# Altium PCB Atomizer_medical_V1_4.PCBDOC
Units mil, origin at the board's own origin, x right, y up, seen from the top; angles counter-clockwise.
Board outline 984.71 x 2203.7 mil, 4 copper layers (Top, Inner Layer 2, Inner Layer 3, Bottom), stack 35.4 mil thick; 109 components, 54 nets, 241 pads, 179 vias.
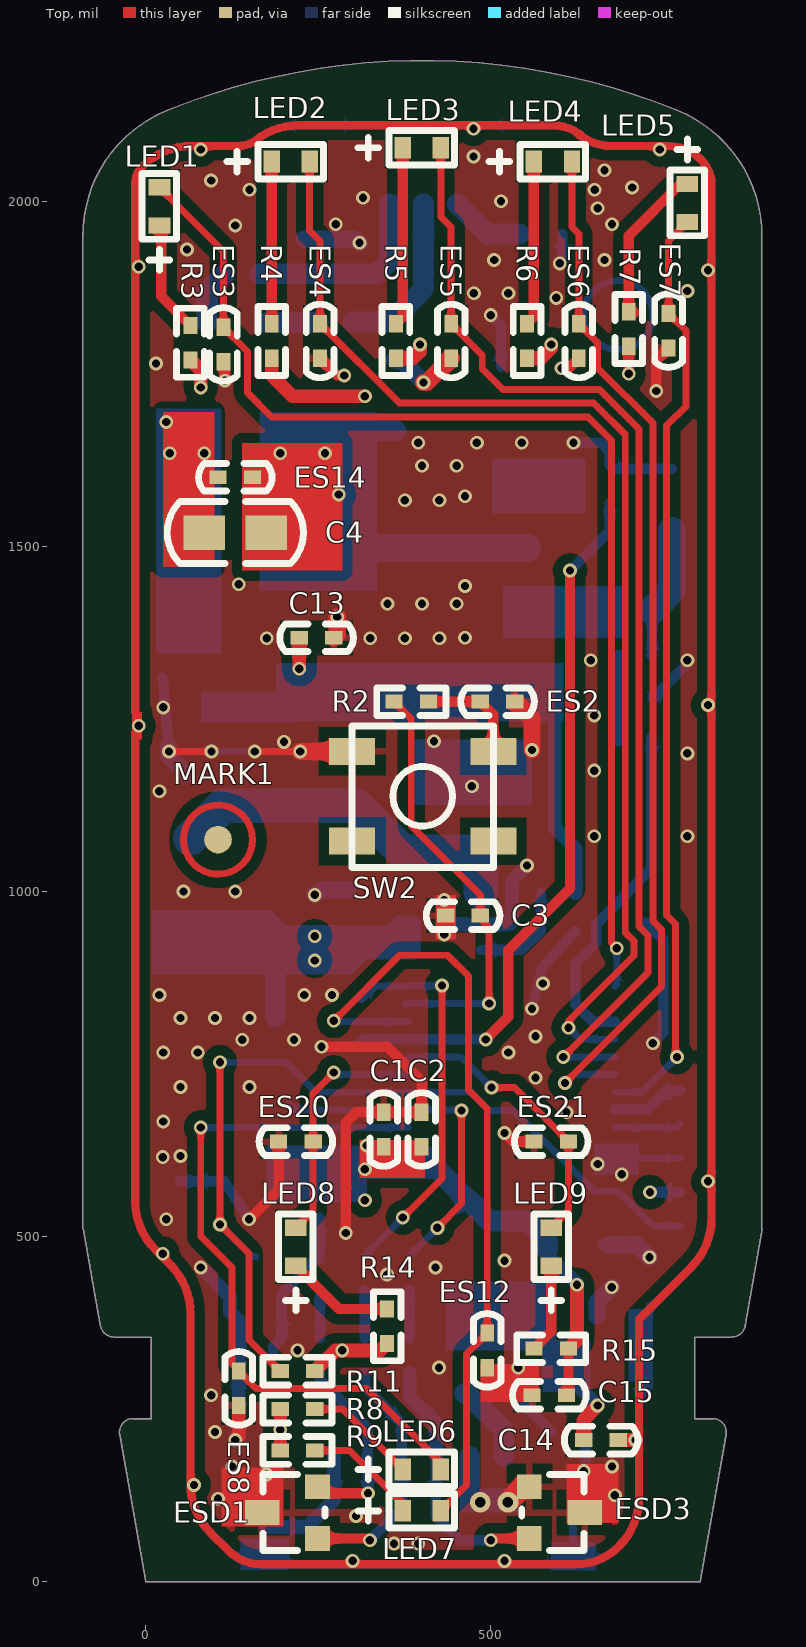
[diagram p0: Top view]
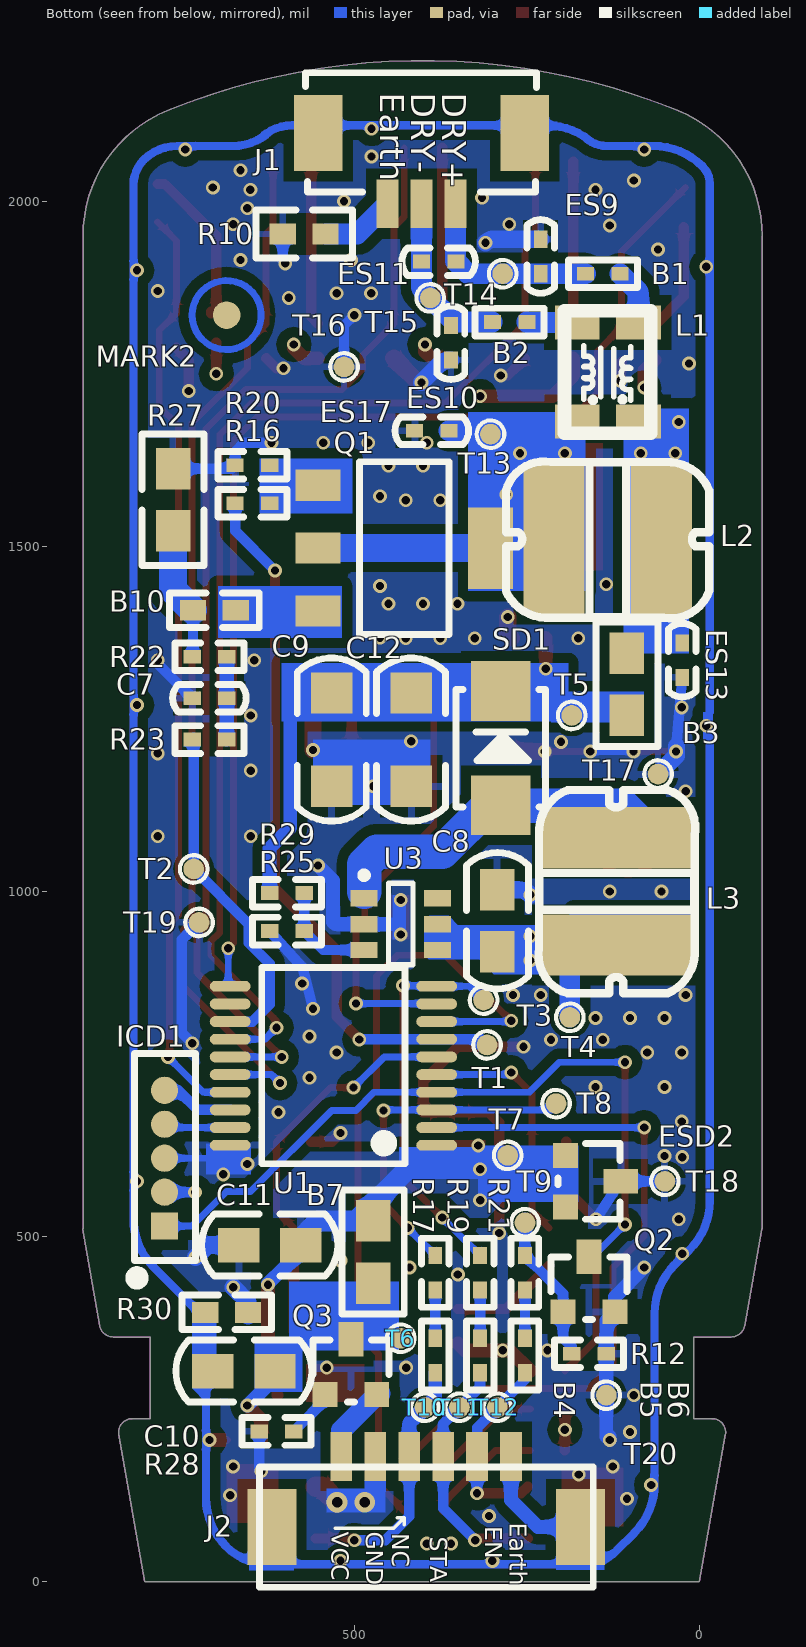
[diagram p1: Bottom view, seen from below]
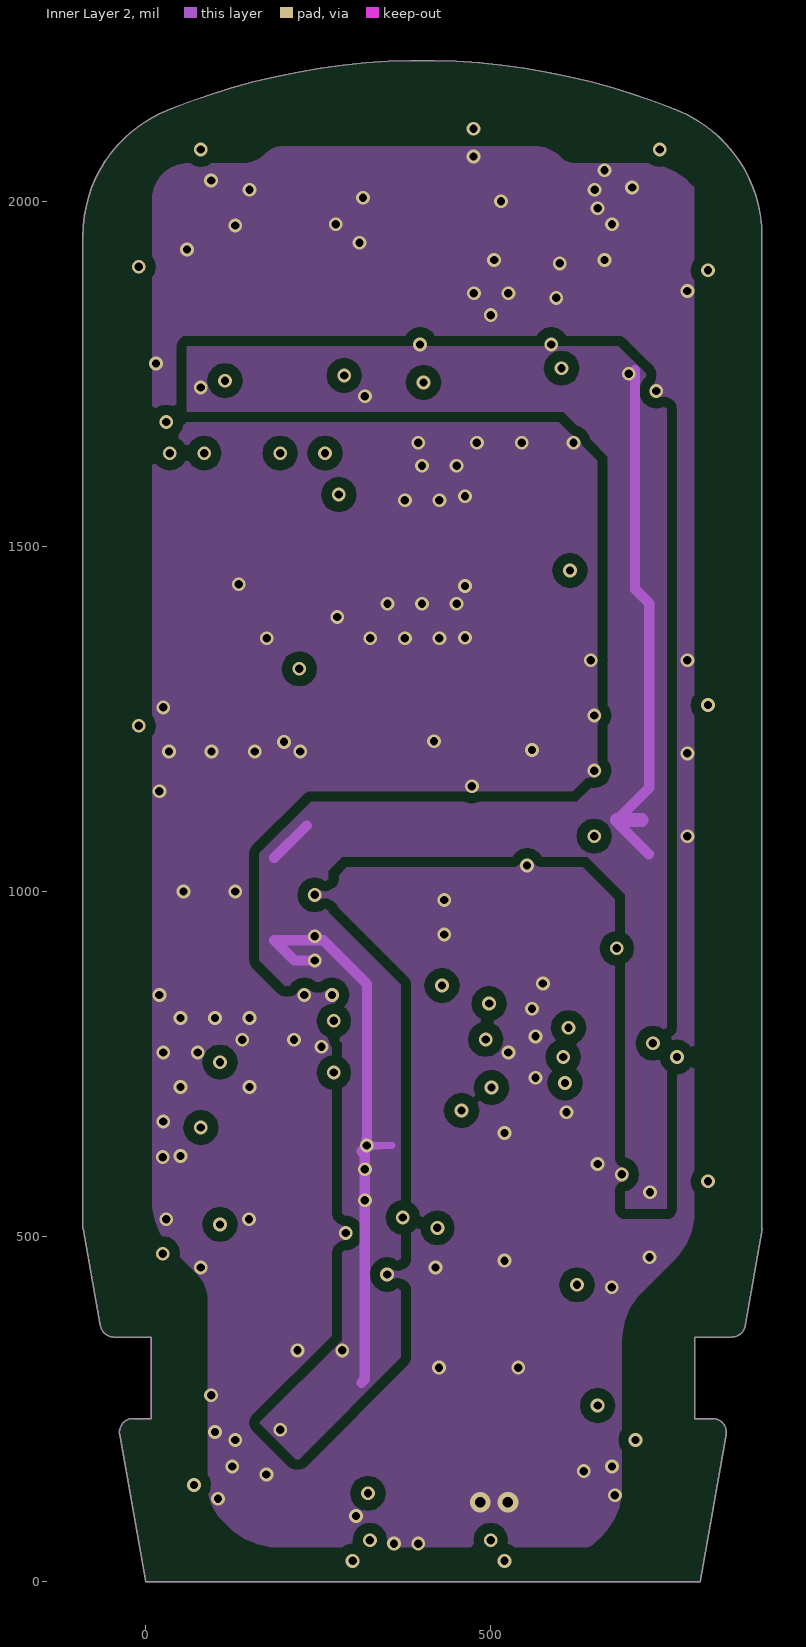
[diagram p2: Inner Layer 2]
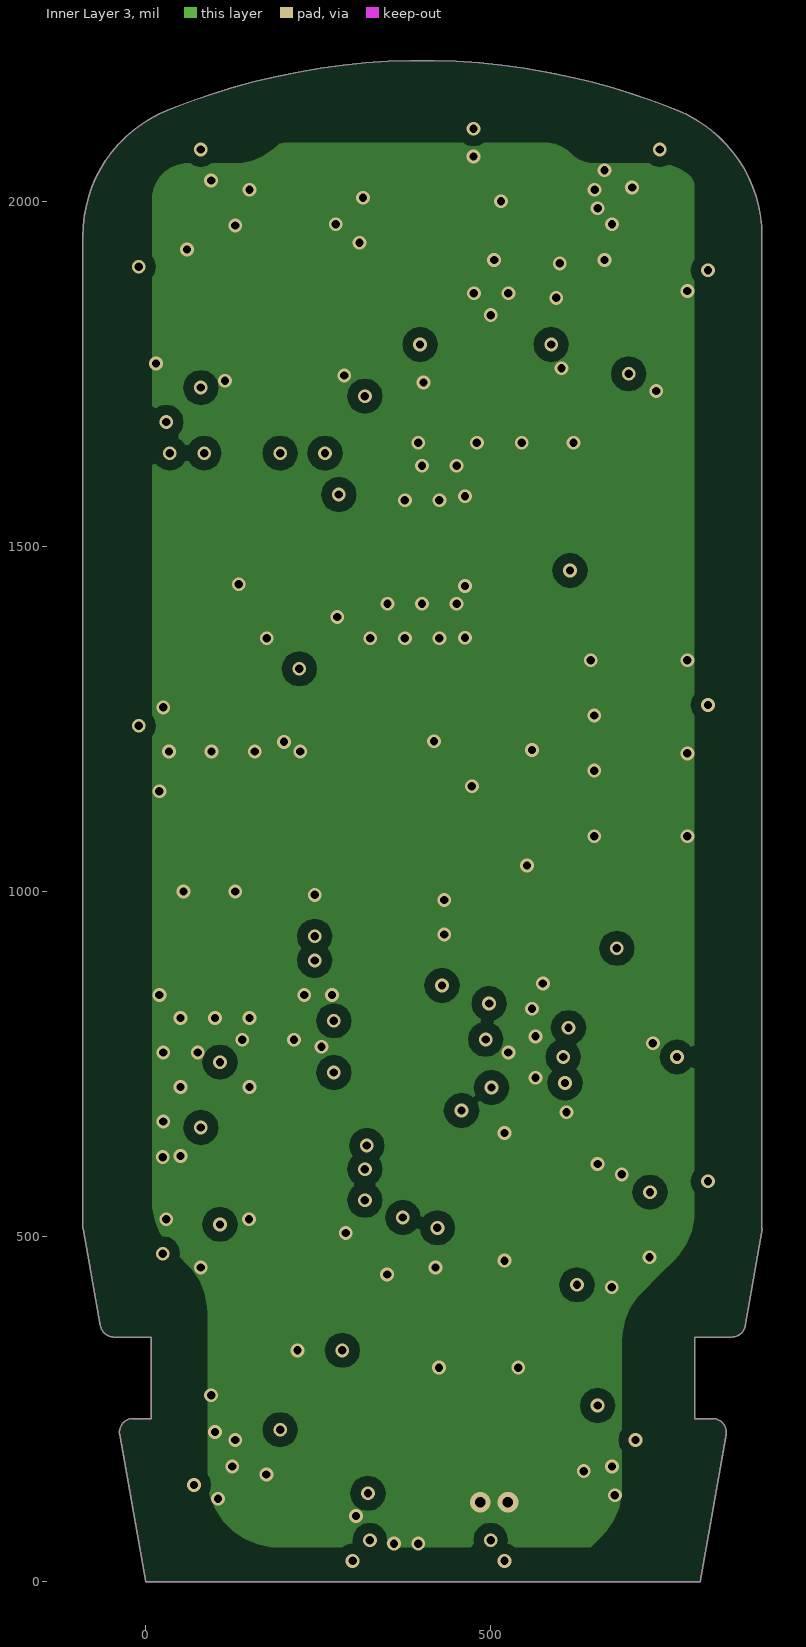
[diagram p3: Inner Layer 3]

## Layer stack, top to bottom
Solder Mask Top: solder mask 0.4, Solder Resist, Dk 3.5
Top: signal copper 1.35
Dielectric1: dielectric 10, FR-4, Dk 4.3
Inner Layer 2: signal copper 1.35
Dielectric2: dielectric 10, FR-4, Dk 4.3
Inner Layer 3: signal copper 1.35
Dielectric3: dielectric 10, FR-4, Dk 4.3
Bottom: signal copper 1.35
Solder Mask Bottom: solder mask 0.4, Solder Resist, Dk 3.5

## Board outline
0,-0.05 -37.59,213.12 cw(c-18.2,216.54) -18.2,236.22 8.07,236.22 8.07,354.33 -45.97,354.33 cw(c-45.97,374.02) -65.35,370.6 -90.06,510.69 -91.11,511.74 -91.11,1949.48 cw(c105.74,1949.48) 31.92,2131.97 cw(c401.02,1219.54) 770.11,2131.97 cw(c696.29,1949.48) 893.14,1949.48 893.14,511.32 893.6,510.66 868.91,370.6 cw(c849.52,374.02) 849.52,354.33 795.48,354.33 795.48,236.22 821.75,236.22 cw(c821.75,216.54) 841.14,213.12 803.55,-0.04 803.55,0

## Design rules (kind name [scope] priority, off if disabled: settings)
Clearance Clearance_polygon [InPolygon] p1: gap=15
Clearance Clearance_all [All] p2: gap=9
ComponentClearance "'Default' PADS rule_12" [All] p1: gap=0 collisioncheckmode=3 verticalgap=0 showdistances=FALSE
FlightTimeFalling "'Default' PADS rule_10" [All] p1: maximum=10.00
FlightTimeRising "'Default' PADS rule_9" [All] p1: maximum=10.00
Length "'Default' PADS rule_5" [All] p1: maxlimit=50000 minlimit=0
MatchedLengths "'Default' PADS rule_11" [InNetClass('All Nets')] p1: tolerance=200 checknetsindiffpair=TRUE checkdiffpairvsdiffpair=FALSE checkxsignals=FALSE checkothers=FALSE
MaxMinImpedance "'Default' PADS rule_8" [All] p1: minimum=50.00 maximum=150.0
MinimumSolderMaskSliver [All] p1: minsoldermaskwidth=0
ParallelSegment "'Default' PADS rule_7" [All] p1: limit=1000 gap=200
ParallelSegment "'Default' PADS rule_6" [All] p2: limit=1000 gap=200
PlaneClearance "'Default' PADS rule_14" [All] p1: clearance=13
PlaneConnect "Power Plane Connect Style - from global settings" [All] p1: planeconnectstyle=Relief reliefexpansion=20 reliefentries=2 reliefconductorwidth=15 reliefairgap=10
PolygonConnect PolygonConnect_via [IsVia] p1: connectstyle=Direct reliefconductorwidth=10 reliefentries=4 polygonreliefangle="90 Angle" airgapwidth=10
PolygonConnect [All] p2: connectstyle=Relief reliefconductorwidth=10 reliefentries=4 polygonreliefangle="90 Angle" airgapwidth=15
RoutingCorners [All] p1: cornerstyle=45-Degree minsetback=10 maxsetback=100
RoutingLayers "'Default' PADS rule_3" [All] p1: top layer_v5=TRUE mid layer 1_v5=TRUE mid layer 2_v5=TRUE bottom layer_v5=TRUE
RoutingPriority "'Default' PADS rule_2" [All] p1: routingpriority=3
RoutingTopology "'Default' PADS rule" [All] p1: topology=Shortest
RoutingVias "'Default' PADS rule_4" [All] p1: holewidth=12 width=20 viastyle="Through Hole" minholewidth=12 minwidth=20 maxholewidth=35 maxwidth=80
SMDToCorner "'Default' PADS rule_16" [All] p1: distance=0
SMDToPlane "'Default' PADS rule_17" [All] p1: distance=0
SilkToSilkClearance [All] p1: silktosilkclearance=0
SilkToSolderMaskClearance SilkscreenOverComponentPads [IsPad] p1: minsilkscreentomaskgap=0 clearancetoexposedcopper=TRUE
SolderMaskExpansion "Solder Mask Expansion from CAM settings" [All] p1: expansion=5
Width "'Default' PADS rule_13" [All] p1: maxlimit=100 minlimit=10 preferedwidth=10
20 further rules are at their usual default settings.

## Components (designator, comment, footprint, x,y, rotation, side; value= is the part's Value field where it differs from the comment)
B1 "220Ohm@100MHz" 0402-B 115,1895 r0 bottom
B2 "220Ohm@100MHz" 0402-B 250,1825 r0 bottom
B3 "1K±25%@100MHz" 0805-B 105,1255 r90 bottom
B4 "220Ohm@100MHz" 0402-B 382.76,302.52 r90 bottom
B5 "220Ohm@100MHz" 0402-B 317.76,302.52 r90 bottom
B6 "220Ohm@100MHz" 0402-B 252.76,302.52 r90 bottom
B7 "1K±25%@100MHz" 0805-B 472.76,432.52 r90 bottom
B10 "1K±25%@100MHz" 0603 702.76,1407.52 r180 bottom
C1 "100nF/50V" 0402-C 345,680 r270 top
C2 "100nF/50V" 0402-C 400,680 r270 top
C3 "100nF/50V" 0402-C 435,965 r0 top
C4 "100pF/100V" 0805-C 85,1520 r0 top
C7 "1uF/10V" 0402-C 685,1280 r0 bottom
C8 "22uF/16V" 0805-C 292.76,912.52 r90 bottom
C9 "22uF/25V" 1206-C 532.76,1287.52 r270 bottom
C10 "22uF/16V" 0805-C 615,305 r0 bottom
C11 "22uF/16V" 0805-C 577.76,487.52 r0 bottom
C12 "22uF/25V" 1206-C 417.76,1287.52 r270 bottom
C13 "100nF/50V" 0402-C 222.76,1367.52 r0 top
C14 "100nF/50V" 0402-C 635,205 r0 top
C15 "100nF/50V" 0402-C 610,270 r180 top
ES2 "NC" 0402-C 485,1275 r0 top
ES3 "NC" 0402-C 112.76,1767.52 r90 top
ES4 "NC" 0402-C 252.76,1772.52 r90 top
ES5 "NC" 0402-C 442.76,1772.52 r90 top
ES6 "NC" 0402-C 627.76,1772.52 r90 top
ES7 "NC" 0402-C 757.76,1787.52 r90 top
ES8 "NC" 0402-C 135,255 r90 top
ES9 "NC" 0402-C 230,1945 r270 bottom
ES10 "NC" 0402-C 360,1820 r270 bottom
ES11 "NC" 0402-C 352.76,1912.52 r0 bottom
ES12 "NC" 0402-C 495,310 r90 top
ES13 "NC" 0402-C 25,1310 r90 bottom
ES14 "NC" 0402-C 105,1600 r0 top
ES17 "NC" 0402-C 362.76,1667.52 r0 bottom
ES20 "NC" 0402-C 192.76,637.52 r0 top
ES21 "NC" 0402-C 562.76,637.52 r0 top
ESD1 "PESD5V2S2UT" SOT23 210,100 r90 top
ESD2 "PESD5V2S2UT" SOT23 155,580 r270 bottom
ESD3 "PESD5V2S2UT" SOT23 595,100 r270 top
ICD1 "NC" SIP1X5P1.25A-180-DIP 775,515 r90 bottom
J1 "1.25T-3PWT" WAFER_1.25MMX3P_180 402.76,2047.52 r0 bottom locked
J2 "1.25T-6PWT" WAFER_1.25MMX6P_180 395.98,79.16 r180 bottom locked
L1 "22uH@100kHz/50V 1812" LINEFILTER 132.76,1752.52 r90 bottom
L2 "470uH/260mA" SP0502 132.76,1509.76 r180 bottom
L3 "10uH/2.5A" SP0502 120,1000 r90 bottom
LED1 "LED_BLUE" LED0603 20,1965 r90 top
LED2 "LED_BLUE" LED0603 182.64,2057.52 r0 top
LED3 "LED_BLUE" LED0603 372.64,2077.52 r0 top locked
LED4 "LED_BLUE" LED0603 562.64,2057.52 r0 top locked
LED5 "LED_BLUE" LED0603 785,2025 r270 top
LED6 "LED_RED" LED0603 372.64,162.52 r0 top locked
LED7 "LED_GREEN" LED0603 372.64,102.52 r0 top locked
LED8 "LED_BLUE" LED0603 217.76,457.4 r90 top locked
LED9 "LED_BLUE" LED0603 587.76,457.4 r90 top locked
MARK1 "MARK_POINT" MARK_POINT 105,1075 r90 top
MARK2 "MARK_POINT" MARK_POINT 685,1835 r90 bottom
Q1 "HSL0004" SOT223 427.76,1497.52 r270 bottom
Q2 "MMBT3904" SOT23 160,430 r180 bottom
Q3 "AO3401" SOT23 505,310 r180 bottom
R2 "NC" 0402 385,1275 r180 top
R3 "220/1%" 0402 65,1795 r90 top
R4 "220/1%" 0402 182.76,1797.52 r90 top
R5 "220/1%" 0402 362.76,1797.52 r90 top
R6 "220/1%" 0402 552.76,1797.52 r90 top
R7 "220/1%" 0402 700,1815 r90 top
R8 "220/1%" 0402 220,250 r0 top
R9 "220/1%" 0402 220,190 r0 top
R10 "0/1%" 0603 572.76,1952.52 r0 bottom
R11 "4.7K/1%" 0402 220,305 r0 top
R12 "220K/1%" 0402 160,330 r0 bottom
R14 "220/1%" 0402 350,370 r90 top
R15 "220/1%" 0402 587.76,337.52 r180 top
R16 "30/1%" 0402 647.76,1562.52 r180 bottom
R17 "47/1%" 0402 382.76,447.52 r270 bottom
R19 "47/1%" 0402 317.76,447.52 r270 bottom
R20 "220K/1%" 0402 647.76,1617.52 r180 bottom
R21 "47/1%" 0402 252.76,447.52 r270 bottom
R22 "10K/1%" 0402 710,1340 r0 bottom
R23 "1K/1%" 0402 710,1220 r180 bottom
R25 "10K/1%" 0402 597.76,942.52 r0 bottom
R27 "1r/1%" 0805 762.76,1567.52 r270 bottom
R28 "10K/1%" 0402 612.76,217.52 r180 bottom
R29 "220K/1%" 0402 597.76,997.52 r0 bottom
R30 "0/1%" 0603 685,390 r0 bottom
SD1 "SS24" SMA-403D 287.76,1207.52 r270 bottom
SW2 "NC" HTS-52MB 401.57,1137.88 r0 top
T1 "PWM" TP-SIP-1-Small1 307.76,777.52 r180 bottom
T2 "CT_AD" TP-SIP-1-Small1 732.76,1032.52 r180 bottom
T3 "STA" TP-SIP-1-Small1 312.76,842.52 r180 bottom
T4 "+5V" TP-SIP-1-Small1 187.76,817.52 r180 bottom
T5 "15VDC" TP-SIP-1-Small1 185,1255 r180 bottom
T6 "VIN" TP-SIP-1-Small1 432.76,352.52 r180 bottom
T7 "VCC" TP-SIP-1-Small1 277.76,617.52 r180 bottom
T8 "NC" TP-SIP-1-Small1 207.76,692.52 r180 bottom
T9 "EN_FOG" TP-SIP-1-Small1 252.76,520 r180 bottom
T10 "Dev_NC" TP-SIP-1-Small1 397.76,252.52 r90 bottom
T11 "NebSt" TP-SIP-1-Small1 347.76,252.52 r90 bottom
T12 "EN_Fog" TP-SIP-1-Small1 292.76,252.52 r90 bottom
T13 "DRY" TP-SIP-1-Small1 302.76,1662.52 r90 bottom
T14 "P+" TP-SIP-1-Small1 285,1895 r90 bottom
T15 "P-" TP-SIP-1-Small1 390,1860 r90 bottom
T16 "GND" TP-SIP-1-Small1 515,1760 r90 bottom
T17 "GND" TP-SIP-1-Small1 60,1170 r90 bottom
T18 "GND" TP-SIP-1-Small1 50,580 r90 bottom
T19 "GND" TP-SIP-1-Small1 725,955 r90 bottom
T20 "GND" TP-SIP-1-Small1 135,270 r90 bottom
U1 "PIC16F1578-I/SS" SSOP-20 530.4,747.41 r90 bottom
U3 "MT3608" SOT95P280X110-6N 432.76,952.52 r180 bottom

## Footprints (in the part's own frame and the unit in brackets; to place one, negate y for a bottom-side part, rotate by r counter-clockwise, add the part's x,y. Pads: shape width x height; smd on the part's side, far side on the other; paste and mask are expansions set on the pad)
0402 [mil]
  rect 25x20 smd: 1(-25,0) 2(25,0)
  silkscreen extent -50,-20 50,20
0402-B [mil] "BEAD-0402"
  rect 25x20 smd: 1(0,0) 2(50,0)
  silkscreen extent -25,-20 75,20
0402-C [mil] "CAP-0402"
  rect 25x20 smd: 1(0,0) 2(50,0)
  silkscreen extent -28,-20 78,20
0603 [mil]
  rect 38x30 smd: 1(-31,0) 2(31,0)
  silkscreen extent -65,-25 65,25
0805 [mil]
  rect 60x50 smd: 1(-45,0) 2(45,0)
  silkscreen extent -95,-45 95,45
0805-B [mil] "BEAD"
  rect 60x50 smd: 1(0,0) 2(90,0)
  silkscreen extent -45,-45 135,45
0805-C [mil] "CAP-0805"
  rect 60x50 smd: 1(0,0) 2(90,0)
  silkscreen extent -54,-45 144,45
1206-C [mil] "CAP-1206"
  rect 60x60 smd: 1(0,0) 2(135,0)
  silkscreen extent -51,-50 186,50
HTS-52MB [mm]
  rect 1.7x1 smd: 1(-2.6,1.65) 2(2.6,1.65) 3(-2.6,-1.65) 4(2.6,-1.65)
  silkscreen extent -2.6,-2.62 2.6,2.59
LED0603 [mm] "LED"
  rect 0.6x0.8 smd: 1(0,0) 2(1.4,0)
  silkscreen extent -1.65,-0.64 1.91,0.64
LINEFILTER [mm]
  rect 1.25x1.65 smd: 1(-1.825,-1.125) 2(1.825,-1.125) 3(1.825,1.125) 4(-1.825,1.125)
  silkscreen extent -2.25,-1.58 2.25,1.59
MARK_POINT [mil] "MARK"
  round 40 smd: 0(0,0)
  Top circle w10: c0,0 r50
SIP1X5P1.25A-180-DIP [mm]
  rect 1x1 smd: 1(0,0)
  round 1 smd: 2(1.25,0) 3(2.5,0) 4(3.75,0) 5(5,0)
  silkscreen extent -2.08,-1.14 6.35,1.2
SMA-403D [mm]
  rect 2.2x2.2 smd: 1(2.1,0) 2(-2.1,0)
  silkscreen extent -2.16,-1.65 2.16,1.65
SOT23 [mil]
  rect 36x36 smd: 1(-37.5,-39) 2(37.5,-39)
  rect 36x50 smd: 3(0,41)
  silkscreen extent -55,-50 55,40
SOT95P280X110-6N [mm] "SOT23, 6-Leads, Body 2.90x2.80mm, Pitch 0.95mm, IPC Medium Density"
  rect 1x0.6 smd: 1(-1.35,0.95) 2(-1.35,0) 3(-1.35,-0.95) 4(1.35,-0.95) 5(1.35,0) 6(1.35,0.95)
  silkscreen extent -1.48,-1.5 0.45,1.92, body extent -0.85,-1.5 0.85,1.5, height 1.1
SOT223 [mil]
  rect 45x65 smd: 1(-91,-125) 2(0,-125) 3(91,-125)
  rect 118x65 smd: 2(0,125)
  silkscreen extent -125,-65 125,65
SP0502 [mm]
  rect 2.25x5.5 smd: 1(-1.975,0) 2(1.975,0)
  silkscreen extent -3.75,-2.9 3.73,2.87
SSOP-20 [mm]
  oval 0.4x1.5 smd: 1(-2.925,-3.8) 2(-2.275,-3.8) 3(-1.625,-3.8) 4(-0.975,-3.8) 5(-0.325,-3.8) 6(0.325,-3.8) 7(0.975,-3.8) 8(1.625,-3.8) 9(2.275,-3.8) 10(2.925,-3.8) 11(2.925,3.8) 12(2.275,3.8) 13(1.625,3.8) 14(0.975,3.8) 15(0.325,3.8) 16(-0.325,3.8) 17(-0.975,3.8) 18(-1.625,3.8) 19(-2.275,3.8) 20(-2.925,3.8)
  silkscreen extent -3.61,-2.64 3.61,2.63
TP-SIP-1-Small1 [mil] "test point"
  round 30 smd: 1(0,0)
  silkscreen extent -20,-20 20,20
WAFER_1.25MMX3P_180 [mm] "1.25T-3PWT"
  rect 0.8x1.8 smd: 1(-1.25,1.3) 2(0,1.3) 3(1.25,1.3)
  rect 1.8x2.8 smd: 4(3.8,-1.3) 5(-3.8,-1.3)
  silkscreen extent -4.23,-3.52 4.26,0.86
WAFER_1.25MMX6P_180 [mm]
  rect 0.8x1.8 smd: 1(-3.125,2.6) 2(-1.875,2.6) 3(-0.625,2.6) 4(0.625,2.6) 5(1.875,2.6) 6(3.125,2.6)
  rect 1.8x2.8 smd: 7(-5.675,0) 8(5.675,0)
  silkscreen extent -6.13,-2.22 6.15,2.21

## Part data
B1 B2 B3 B4 B5 B6 B7 L2 L3: library part Inductor, "Inductor"
B10 R2 R3 R4 R5 R6 R7 R8 R9 R10 R11 R12 R14 R15 R16 R17 R19 R20 R21 R22 R23 R25 R27 R28 R29 R30: library part Res3, "Resistor"
C1 C2 C3 C4 C7 C13 C14 C15 ES2 ES3 ES4 ES5 ES6 ES7 ES8 ES9 ES10 ES11 ES12 ES13 ES14 ES17 ES20 ES21: library part "Cap Semi", "Capacitor (Semiconductor SIM Model)"
C8 C9 C10 C11 C12: library part Cap2, "Capacitor"
ESD1 ESD2 ESD3: library part ESD, "ESD"
ICD1 J1: library part "Header 5", "Header, 5-Pin"
J2: library part "Header 8", "Header, 8-Pin"
L1: library part Inductor_common, "Inductor_common"
LED1 LED2 LED3 LED4 LED5 LED6 LED7 LED8 LED9: library part LED2, "Typical RED, GREEN, YELLOW, AMBER GaAs LED"
Q1: library part MOSFET-N, "N-Channel MOSFET"
Q2: library part NPN, "NPN Bipolar Transistor"
Q3: library part MOSFET-P, "P-Channel MOSFET"
SD1: library part "D Schottky", "Schottky Diode"
SW2: library part SW-PB, "Switch"
T1 T2 T3 T4 T5 T6 T7 T8 T9 T10 T11 T12 T13 T14 T15 T16 T17 T18 T19 T20: library part TP-SIP-1-Small
U1: "PIC16  SSOP-20"
U3: "DC-DC-BOOST"

## Via types
v1: diameter 20, hole 12, Top to Bottom, tented both sides, 177 vias
v2: diameter 30, hole 15, Top to Bottom, tented both sides, 2 vias

## Nets (pads, with @x,y where several pads share a name; then routed paths per layer and width w, separated by ;. In a path a pad name is that pad's centre, name@x,y a point inside that pad or via, vN(x,y) a via of type N, cw(c..) or ccw(c..) an arc to the next point about the centre after c; other vN are vias at no path point)
15VDC: B3.1 C9.1 C12.1 C13.1 R29.2 SD1.2 T5.1 | length 397.8
  Top w20: v1(222.76,1322.52) C13.1
  Bottom w10: C12.1@425.17,1289.58 C12.1@426.64,1291.04
  Bottom w20: C9.1 572.76,1287.52 592.76,1267.52 592.76,1092.52 622.76,1062.52 R29.2
+5V: B7.2 C1.2 C2.2 C8.1 C11.1 C15.1 ESD2.1 ESD2.2 ICD1.2 L3.1 R3.1 R4.1 R5.1 R6.1 R7.1 R8.1 R9.1 R11.2 R14.1 R15.1 T4.1 T7.1 U1.1 U3.4 U3.5 | length 3275.9
  Top w15: R9.1 v1(195,220) R8.1 ; C15.1 612.76,270 R15.1 ; v1(700,1750) R7.1@700,1795
  Top w20: R3.1 80,1755 v1(80,1730) ; R4.1 182.76,1747.52 212.76,1717.52 v1(317.76,1717.52) ; R11.2 275,335 v1(285,335) 340,335 R14.1 ; R5.1 387.76,1772.52 397.76,1782.52 v1(397.76,1792.52) ; R6.1 572.76,1772.52 587.76,1787.52 v1(587.76,1792.52) ; R15.1 625,349.76 v1(625,430)
  Inner Layer 2 w10: v1(320.59,631.74) 320.87,631.74 356.89,631.74
  Inner Layer 2 w15: 186.31,1048.54 233.28,1095.52 ; v1(245,900) 215.54,900 186.31,929.23 257.22,929.23 320.87,865.57 320.87,656.08 ; 312.76,287.98 317.76,292.98 317.76,618.62 312.76,623.62 320.87,631.74 320.87,656.08 ; v1(320.59,631.74) 320.87,656.08 ; 709.21,1755 709.21,1437.66 729.65,1417.22 729.65,1150.08 683.2,1103.64 681.17,1101.61 729.09,1053.68
  Inner Layer 2 w20: 683.2,1103.64 718.59,1103.64
  Bottom w10: L3.1@24.11,919.85 63.3,919.85 64.91,921.45 254.29,921.45 254.35,921.39 245,912.05 230.76,897.81 ; U1.1@356.89,631.74 U1.1@380.79,631.74
  Bottom w15: 254.35,921.39 255.87,919.87 ; U1.1@380.79,631.74 U1.1 ; v1(730.79,564.21) ICD1.2
  Bottom w20: v1(245,900) 245,912.05 245,912.17 254.29,921.45 ; C11.1@582.76,482.52 C11.1 577.76,477.24 601,454 602.87,454 625,431.87 v1(625,430)
  Bottom w30: T4.1 L3.1@187.76,892.52 ; v1@318.76,598.52 421.76,598.52 497.76,522.52 552.76,522.52 582.76,492.52 C11.1@582.76,482.52
  other v1: 317.76,552.52 317.76,597.52 245,935
ALARM: ES8.2 LED6.2 U1.2 | length 1034.1
  Top w10: v1(80,657.85) 80,500 125,455 125,315 ES8.2 160,280 220,280 320.28,280 427.76,172.52 LED6.2
  Bottom w10: v1(80,657.85) U1.2
ATO_1: ES3.2 LED1.2 U1.11 | length 1701.7
  Top w10: LED1.2@20.08,2020.2 112.76,1927.52 ES3.2 147.76,1782.52 147.76,1722.52 182.76,1687.52 641.04,1687.52 675,1653.56 675,925.28 v1(682.76,917.52)
  Bottom w10: U1.11 682.76,865.32 v1(682.76,917.52)
ATO_2: ES4.2 LED2.2 U1.14 | length 1728.1
  Top w10: LED2.2 237.76,1957.52 252.76,1942.52 ES4.2 367.76,1707.52 649.33,1707.52 695,1661.85 695,940.63 707.76,927.88 707.76,907.16 612.76,812.16 v1(612.76,802.52)
  Bottom w10: v1(612.76,802.52) 629.48,785.8 U1.14
ATO_3: ES5.2 LED3.2 U1.15 | length 1649.7
  Top w10: LED3.2 427.76,1977.52 442.76,1962.52 ES5.2 487.76,1777.52 487.76,1757.52 517.76,1727.52 657.61,1727.52 715,1670.13 715,948.92 727.76,936.16 727.76,882.16 605.81,760.21 v1(605.07,760.21)
  Bottom w10: v1(605.07,760.21) U1.15
ATO_4: ES6.2 LED4.2 U1.16 | length 1524.1
  Top w10: v1(607.76,722.52) 747.76,862.52 747.76,944.44 735,957.2 735,1678.42 655,1758.42 655,1795.28 ES6.2 627.76,1952.52 617.76,1962.52 LED4.2
  Bottom w10: v1(607.76,722.52) 619.86,734.62 U1.16
ATO_5: ES7.2 LED5.2 U1.17 | length 1360.5
  Top w10: v1(770,760) 767.76,762.24 767.76,952.73 755,965.49 755,1675 782.76,1702.76 782.76,1812.52 ES7.2 757.76,1942.64 LED5.2
  Bottom w10: U1.17 719.27,709.03 770,759.76 v1(770,760)
CT_AD: R23.1 T2.1 U1.13 | length 499.1
  Bottom w15: U1.13 648.06,811.39 622.76,836.69 622.76,895.27 652.76,925.27 652.76,952.52 T2.1 R23.1@732.76,1222.52
DEV_NC: B4.1 ESD3.2 J2.3 T10.1 | length 370.8
  Top w15: v1@502.5,62.5 ESD3.2
  Bottom w15: J2.3 420.59,94.69 455.28,60 v1(500,60)
  Bottom w20: B4.1 382.76,267.52 T10.1 420.59,229.69 J2.3
DRY: C4.2 ES14.2 ES17.1 L1.4 L2.1 Q1.2 T13.1 | length 476.3
  Bottom w30: T13.1 cw(c314.83,1650.45) 314.83,1667.52 ES17.1
  Bottom w40: T13.1 302.76,1575 302.76,1497.52 Q1.2@552.76,1497.52
  other v1: 280,1575 195,1635 260,1635
EN: ICD1.1 Q2.3 R11.1 U1.4 | length 1320.8
  Top w10: v1(107.76,752.52) v1(107.76,517.52) 150,475.28 150,350 R11.1
  Bottom w10: v1(107.76,517.52) 154.28,471 Q2.3 ; v1(107.76,752.52) 202.76,752.52 246.25,709.03 U1.4 471.25,709.03 497.76,682.52 532.76,682.52 650.28,565 685,565 735,515 ICD1.1
EN_FOG: B6.1 ESD1.2 J2.5 T12.1 | length 305.1
  Top w15: ESD1.2 258.66,127.84 v1(322.16,127.84)
  Bottom w15: B6.1 252.76,292.52 T12.1 322.16,223.12 J2.5@322.16,185.77 ; J2.5@320.63,161.88 320.63,184.23 J2.5@322.16,185.77 ; v1(322.16,127.84) J2.5 J2.5@322.16,185.77
GND: C1.1 C2.1 C3.1 C7.2 C8.2 C9.2 C11.2 C12.2 C13.2 C15.2 ES2.2 ES3.1 ES4.1 ES5.1 ES6.1 ES7.1 ES8.1 ES9.1 ES10.2 ES12.1 ES13.1 ES17.2 ES20.1 ES21.1 ESD1.3 ESD2.3 ESD3.1 ESD3.3 ICD1.3 J2.2 Q2.2 R10.2 R12.1 R20.1 R25.2 R27.1 R28.1 R30.1 SW2.1 T16.1 T17.1 T18.1 T19.1 T20.1 U1.20 U3.2 | length 3429.7
  Top w10: v1(34,1202.76) v1(95.45,1202.76) ; v1(158.18,1202.76) 200.66,1202.76 v1(224.11,1202.76)
  Top w15: ES3.1 115,1765.28 v1(115,1740) ; v1(150,525) 192.76,567.76 ES20.1 ; ES4.1 277.76,1747.52 v1(287.76,1747.52) ; v1(255,775) 350,775 400,725 C2.1 C1.1 305,680 290,665 v1(290,505) ; v1(520,650) 532.48,637.52 ES21.1 ; v1(602.76,1758.1) 613.34,1758.1 ES6.1 ; v1(740,1725) 740,1769.76 ES7.1
  Top w20: v1(130,205) 135,210 ES8.1
  Top w25: v1@224.19,1202.84 SW2.1 ; C13.2 277.76,1372.52 v1(277.76,1397.52) ; v1(402.76,1737.52) 407.76,1737.52 ES5.1 ; ES2.2 560,1250 v1(560,1205)
  Top w30: v2(525,115) 547.5,137.5 ESD3.1
  Bottom w10: v1(95.45,1202.76) v1(158.18,1202.76) ; C12.2@401.85,1156.04 C12.2@426.64,1156.04 ; C9.2@516.08,1129.75 516.08,1156.04 C9.2@538.02,1156.04 ; 685,615 686.57,613.43 ICD1.3
  Bottom w15: ES13.1 26.05,1297.5 28.61,1266.94 v1@33.37,1210.28 ; T18.1 ESD2.3 125.78,562 v1(150,525) ; v1(500,1835) 515,1820 T16.1 ; v1(560,830) 569.56,868.22 575,890 613.67,932.52 R25.2 ; v1(600,1910) 603.76,1913.76 R10.2 ; v1(620,1650) 660,1650 672.76,1637.24 R20.1 677.76,1612.52 R27.1 ; v1(635,160) 637.76,162.76 R28.1 ; T19.1 750,930 750,795 v1(735,780) ; C7.2 785,1330 v1(785,1335)
  Bottom w20: v1(80,455) 122.5,412.5 Q2.2 135,378.5 R12.1 T20.1 v1@135,210 ; v1(130,205) v1@130,210 ; 447.76,952.52 U3.2 527.76,952.52 530.91,955.67 530.91,1015.67 v1(552.76,1037.52)
  Bottom w25: v1@33.37,1210.28 33.37,1196.63 T17.1 ; ES9.1 275.66,1945 297.93,1945 cw(c297.93,1927.93) v1(310,1940) ; v1(245,995) cw(c263.15,976.85) 263.15,1002.52 C8.2 ; ES10.2 cw(c360,1745.18) 377.55,1762.73 v1(402.76,1737.52) ; R30.1@654,385 654,389 R30.1@654.5,389.5 ; R30.1 654,405 v1(675.5,426.5) ; C11.2 712.48,487.52 v1(730,470)
  Bottom w30: J2.2 469.8,130.2 v2(485,115) v2(525,115)
  other v1: 360,55 395,55 305,95 105,120 680,125 175,155 125.66,166.69 675.66,166.69 100.66,216.69 95,270 425,310 540,310 220,335 350,445 420,455 520,465 30,525 690,590 655,605 25,615 50.66,616.69 25.66,666.69 610,680 50.66,716.69 150.66,716.69 565,730 25.66,766.69 75.66,766.69 525.66,766.69 140,785 215,785 565,790 50.66,816.69 100.66,816.69 150.66,816.69 20,850 230,850 270,850 575.66,866.69 432.76,937.52 432.76,987.52 55,1000 130,1000 650,1080 785,1080 20,1145 472.76,1152.52 650,1175 785,1200 200.66,1216.69 417.76,1217.52 650,1255 25.66,1266.69 645,1335 175.66,1366.69 325.66,1366.69 375.66,1366.69 425.66,1366.69 462.76,1367.52 350.66,1416.69 400.66,1416.69 450.66,1416.69 462.76,1442.52 135,1445 375.66,1566.69 425.66,1566.69 462.76,1572.52 400.66,1616.69 450.66,1616.69 395,1650 480,1650 545,1650 15,1765 595,1860 475.66,1866.69 525.66,1866.69 785,1870 505,1915 665,1915 60,1930 130,1965 275.66,1966.69 675.66,1966.69 655,1990 515,2000 315,2005 150.66,2016.69 650.66,2016.69 705,2020 95,2030 665,2045 475,2065
GND_S: C10.2 C14.2 J1.4 J1.5 J2.6 J2.7 J2.8 R30.2 | length 11260.6
  Top w12: -15,1230 -15,551.42 ccw(c85,551.42) 14.29,480.71 22.5,472.5 35.71,459.29 cw(c-35,388.58) 65,388.58 65,141.42 ccw(c165,141.42) 94.29,70.71 120,45 ccw(c168.28,93.28) 168.28,25 300,25 520,25 623.64,25 ccw(c623.64,112.78) 685.71,50.71 ccw(c615,121.42) 715,121.42 715,205 715,380 790.71,455.71 ccw(c720,526.42) 820,526.42 820,580 820,1270 820,1900 820,2023.79 ccw(c768.79,2023.79) 805,2060 ccw(c756.72,2011.72) 804.95,2060.05 ccw(c756.72,2011.72) 756.72,2080 745,2080 676.51,2080 cw(c676.51,2160.5) 640.91,2088.3 cw(c676.51,2160.5) 635.67,2091.13 ; -15,1260 -15,1905 -15,2025.86 cw(c19.14,2025.86) -5,2050 -4.29,2050.71 cw(c66.42,1980) 66.42,2080 80,2080 133.97,2080 ccw(c133.97,2125.46) 156.21,2085.81 ccw(c133.97,2125.46) 166.12,2093.32 cw(c221.42,2010) 221.42,2110 475,2110 590.11,2110 cw(c590.11,2045.57) 621.22,2101.99 ; C14.2 C14.2@696.5,205 ; 621.22,2101.99 ccw(c676.51,2160.5) 635.67,2091.13 ; 621.22,2101.99 cw(c590.11,2045.57) 635.67,2091.13
  Bottom w12: -15,1230 -15,551.42 ccw(c85,551.42) 14.29,480.71 22.5,472.5 35.71,459.29 cw(c-35,388.58) 65,388.58 65,141.42 ccw(c165,141.42) 94.29,70.71 120,45 ccw(c168.28,93.28) 168.28,25 300,25 520,25 623.64,25 ccw(c623.64,112.78) 685.71,50.71 ccw(c615,121.42) 715,121.42 715,205 715,380 790.71,455.71 ccw(c720,526.42) 820,526.42 820,580 820,1270 820,1900 820,2023.79 ccw(c768.79,2023.79) 805,2060 ccw(c756.72,2011.72) 804.95,2060.05 ccw(c756.72,2011.72) 756.72,2080 745,2080 676.51,2080 cw(c676.51,2160.5) 640.91,2088.3 cw(c676.51,2160.5) 635.67,2091.13 ; -15,1260 -15,1905 -15,2025.86 cw(c19.14,2025.86) -5,2050 -4.29,2050.71 cw(c66.42,1980) 66.42,2080 80,2080 133.97,2080 ccw(c133.97,2125.46) 156.21,2085.81 ccw(c133.97,2125.46) 166.12,2093.32 cw(c221.42,2010) 221.42,2110 253.15,2110 475,2110 552.37,2110 590.11,2110 cw(c590.11,2045.57) 621.22,2101.99 ; J2.7@619.41,38.92 J2.7 ; 621.22,2101.99 cw(c590.11,2045.57) 635.67,2091.13 ; 621.22,2101.99 ccw(c676.51,2160.5) 635.67,2091.13
  Bottom w20: J2.8 234.16,79.16 272.95,117.95 J2.6
  other v1: 300,30 520,30 70,140 710,205 25,475 815,580 -10,1240 815,1270 815,1900 -10,1905 80,2075 745,2075 475,2105
H_LED: ES21.2 LED9.2 U1.6 | length 418.3
  Top w10: v1(501.13,715.77) 534.51,715.77 ES21.2 612.76,537.52 LED9.2
  Bottom w10: U1.6@380.7,760.12 U1.6 456.69,760.21 v1(501.13,715.77)
L_LED: ES20.2 LED8.2 U1.5 | length 357
  Top w10: LED8.2 242.76,537.52 ES20.2 242.76,707.52 v1(272.76,737.52)
  Bottom w10: v1(272.76,737.52) 275.66,734.62 U1.5
NC: R17.1 T8.1 U1.3 | length 495.2
  Top w10: v1(422.76,512.52) 457.76,547.52 v1(457.76,682.52)
  Bottom w10: T8.1 216.84,683.44 U1.3 456.84,683.44 v1(457.76,682.52) ; R17.1 v1(422.76,512.52)
NEBST: B5.1 ESD1.1 J2.4 T11.1 | length 357.4
  Top w15: ESD1.1 v1@322.5,62.5
  Bottom w15: B5.1 317.76,282.52 T11.1 371.38,228.9 J2.4 371.38,106.38 v1(325,60)
NetB1_1: B1.1 L1.2 | length 81.6
  Bottom w30: L1.2 88.47,1868.47 B1.1
NetB2_1: B2.1 L1.3 | length 73.2
  Bottom w30: L1.3 249.37,1824.37 B2.1
NetB3_2: B3.2 C4.1 ES13.2 ES14.1 L1.1 L2.2
  other v1: 35,1635 85,1635 30,1680
NetB4_2: B4.2 R17.2 | length 70
  Bottom w15: B4.2 R17.2
NetB5_2: B5.2 R19.2 | length 70
  Bottom w15: B5.2 R19.2
NetB6_2: B6.2 R21.2 | length 70
  Bottom w15: B6.2 R21.2
NetB7_1: B7.1 C10.1 C14.1 Q3.3 T6.1 | length 160.1
  Top w20: C14.1 635,235 v1(655,255)
  Bottom w20: 495,390 530.28,390 ; C10.1 615,295 v1(655,255)
NetB10_1: B10.1 R22.2 R27.2 | length 192.4
  Bottom w15: R22.2@732.76,1342.52 733.76,1343.52 B10.1
  Bottom w40: B10.1 762.76,1436.52 R27.2
NetB10_2: B10.2 Q1.3
NetC7_1: C7.1 R22.1 R23.2 | length 120
  Bottom w20: R23.2 R22.1
NetES2_1: ES2.1 R2.1 SW2.2 | length 155
  Top w15: R2.1 ES2.1 503.94,1256.06 SW2.2
NetJ1_3: J1.3 R10.1 | length 109.9
  Bottom w15: R10.1@542.34,1954.37 R10.1@543.73,1952.98
  Bottom w30: J1.3 495.79,1952.52 R10.1
NetJ2_1: J2.1 Q3.2 | length 115.8
  Bottom w30: Q3.2@462.76,272.52 465.34,272.52 519.01,218.85 J2.1
NetL3_2: L3.2 SD1.1 U3.1 | length 515.8
  Bottom w50: L3.2@64.91,1076.97 112.16,1124.22 305.65,1124.22 372.36,1057.52 467.76,1057.52 485.91,1039.37 U3.1@485.91,999.33
NetLED1_1: LED1.1 R3.2 | length 159.9
  Top w15: LED1.1@22.76,1962.4 22.76,1862.24 R3.2
NetLED2_1: LED2.1 R4.2 | length 235
  Top w15: LED2.1 182.64,1822.64 R4.2
NetLED3_1: LED3.1 R5.2 | length 259.1
  Top w15: R5.2 372.64,1832.4 LED3.1
NetLED4_1: LED4.1 R6.2 | length 239.1
  Top w15: R6.2 562.64,1832.4 LED4.1
NetLED5_1: LED5.1 R7.2 | length 228.5
  Top w15: R7.2 700,1950 775,2025 LED5.1 ; R7.2@707.76,1837.52 R7.2@707.76,1840
NetLED6_1: LED6.1 R8.2 | length 163.9
  Top w10: R8.2 285.16,250 LED6.1
NetLED7_1: LED7.1 R9.2 | length 169.8
  Top w10: R9.2 295.36,190 372.64,112.71 LED7.1
NetLED8_1: LED8.1 R14.2 | length 158.1
  Top w15: LED8.1 280.16,395 R14.2
NetLED9_1: LED9.1 R15.2 | length 130.2
  Top w15: R15.2 587.76,362.52 LED9.1
NetQ1_1: Q1.1 R16.2 R20.2
NetQ2_1: Q2.1 R12.2 R21.1 T9.1 | length 225.6
  Bottom w15: R12.2 185,340 197.5,352.5 Q2.1 197.5,417.26 R21.1 T9.1 T9.1@252.76,527.52
NetQ3_1: Q3.1 R28.2 | length 75.7
  Bottom w15: Q3.1@540.26,273.52 540.26,265.02 R28.2
NetR25_1: R25.1 R29.1 U3.3 | length 153.2
  Bottom w15: U3.3 545.36,915.12 R25.1 R29.1
NORMAL: ES12.2 LED7.2 U1.8 | length 1167.8
  Top w10: v1(272.76,812.52) 367.76,907.52 437.76,907.52 467.76,877.52 467.76,712.52 495,685.28 ES12.2 465,330 465,139.76 LED7.2
  Bottom w10: v1@273.89,811.39 U1.8
P+: B1.2 ES9.2 ES11.1 J1.1 T14.1 | length 278
  Bottom w30: B1.2 ES9.2 T14.1 335.24,1895 ES11.1 ; ES11.1@353.55,1913.31 J1.1
P-: B2.2 ES10.1 ES11.2 J1.2 T15.1 | length 245.2
  Bottom w30: B2.2 350,1825 ccw(c350,1837.07) 358.54,1828.54 T15.1 400,1870 ccw(c393.34,1876.66) 402.76,1876.66 ES11.2 J1.2
PGD: ICD1.4 U1.19 | length 97
  Bottom w10: U1.19 770.21,657.85 ICD1.4
PWM: R16.1 T1.1 U1.7 | length 1040.5
  Top w15: v1(492.76,785.57) 525.26,818.07 525.26,915.02 615,1004.76 v1(615,1465)
  Bottom w15: T1.1 316.04,785.8 U1.7 492.76,785.8 492.99,785.8 v1(492.76,785.57) ; v1(615,1465) 672.76,1522.76 R16.1
REF: ICD1.5 U1.18 | length 106.9
  Bottom w15: U1.18 727.14,683.44 755.32,711.61 755.32,711.85 ICD1.5
STA: R19.1 T3.1 U1.10 | length 563
  Top w10: v1(372.76,527.52) 429.51,584.27 v1(429.51,863.7)
  Bottom w10: T3.1 332.81,862.57 U1.10 381.7,863.47 429.28,863.47 v1(429.51,863.7) ; R19.1 v1(372.76,527.52)
SW_AD: C3.2 R2.2 U1.9 | length 621.4
  Top w10: R2.2 385,1250 385,1095 485,995 C3.2 485,960.28 497.76,947.52 v1(497.76,837.52)
  Bottom w10: U1.9 375.96,836.98 378.62,837.04 379.1,837.52 v1(497.76,837.52)
pads on no net: MARK1.0 MARK2.0 SW2.3 SW2.4 U1.12 U3.6

## Polygon pours and split planes (outlines as drawn)
+5V on Bottom "B_+5V" (solid, remove dead copper, pour order 1006): 592.76,622.52 292.76,622.52 272.76,602.52 272.76,562.52 292.76,542.52 307.76,527.52 327.76,527.52 332.76,527.52 362.76,557.52 367.76,562.52 437.76,562.52 452.76,547.52 452.76,512.52 472.76,492.52 527.76,492.52 547.76,472.52 602.76,417.52 642.76,417.52 642.76,462.52 617.76,487.52 617.76,492.52 617.76,597.52 592.76,622.52
GND on Bottom "B_GND" (solid, remove dead copper, pour order 1012): -195,2290 -195,-140 -190,-145 910,-145 985,-70 985,1820 985,2155 845,2295 840,2290 -195,2290
GND on Top "T_GND" (solid, remove dead copper, pour order 1014): -250,2265 -250,-10 -90,-170 840,-170 940,-70 935,-65 935,2300 920,2315 -190,2315 -200,2315 -250,2265
GND on Inner Layer 2 "IN2_GND" (solid, remove dead copper, pour order 1024): 600,2065 ccw(c624.14,2089.14) 624.14,2055 695,2055 718.58,2055 cw(c718.58,1955) 789.29,2025.71 795,2020 795,536.42 cw(c695,536.42) 765.71,465.71 750,450 719.29,419.29 ccw(c790,348.58) 690,348.58 690,225 690,136.42 cw(c590,136.42) 660.71,65.71 650,55 cw(c637.93,67.07) 637.93,50 550,50 191.42,50 cw(c191.42,150) 120.71,79.29 110,90 cw(c158.28,138.28) 90,138.28 90,210 90,408.79 ccw(c38.79,408.79) 75,445 39.29,480.71 cw(c110,551.42) 10,551.42 10,555 10,2003.79 cw(c61.21,2003.79) 25,2040 cw(c61.21,2003.79) 61.21,2055 95,2055 138.79,2055 ccw(c138.79,2106.21) 175,2070 cw(c199.14,2045.86) 199.14,2080 230,2080 563.79,2080 cw(c563.79,2028.79) 600,2065
+5V on Inner Layer 2 "IN2_+5V" (solid, remove dead copper, pour order 1016): 60,1790 60,1695 605,1695 670,1630 670,1175 625,1130 330,1130 240,1130 165,1055 165,900 210,855 285,780 285,455 285,350 165,230 220,175 370,325 370,400 370,865 265,970 265,1030 285,1050 640,1050 685,1005 695,995 695,540 755,540 755,1720 685,1790
GND on Inner Layer 3 "IN3_GND" (solid, remove dead copper, pour order 1026): 680,2055 741.72,2055 cw(c741.72,1986.72) 790,2035 cw(c777.93,2022.93) 795,2022.93 795,1980 795,536.42 cw(c695,536.42) 765.71,465.71 745,445 719.29,419.29 ccw(c790,348.58) 690,348.58 690,250 690,136.42 cw(c590,136.42) 660.71,65.71 645,50 560,50 191.42,50 cw(c191.42,150) 120.71,79.29 120,80 119.29,80.71 cw(c190,151.42) 90,151.42 90,290 90,388.58 ccw(c-10,388.58) 60.71,459.29 40,480 39.29,480.71 cw(c110,551.42) 10,551.42 10,615 10,2003.79 cw(c61.21,2003.79) 25,2040 cw(c61.21,2003.79) 61.21,2055 115,2055 129.64,2055 ccw(c129.64,2140.36) 190,2080 cw(c202.07,2067.93) 202.07,2085 275,2085 578.79,2085 cw(c578.79,2033.79) 615,2070 ccw(c651.21,2106.21) 651.21,2055 680,2055

## Keep-outs
Keep-Out Layer:
  the board outline again, w0.5

## Other copper
Top:
  rectangle net GND: 420,930 450,995
  rectangle net GND: 485,260 570,315
  rectangle net GND: 110,80 200,165
  rectangle net GND: 610,85 685,170
  rectangle net +5V: 310,585 405,640
  rectangle net GND_S: -20,1220 -5,1260
  rectangle net DRY: 140,1465 285,1649.42
  rectangle net NetB3_2: 25,1470 100,1695
  rectangle net GND_S: 685,195 715,215
Bottom:
  rectangle net GND: 425,930 445,995
  rectangle net GND: 390,1125 560,1220
  rectangle net +5V: 303.96,602.39 435,630
  rectangle net +5V: 175,550 320.59,631.74
  rectangle net 15VDC: 80,1245 215,1290
  rectangle net NetB3_2: 15,1345 110,1700
  rectangle net DRY: 165,1435 335,1695
  rectangle net GND: 650,590 715,635
  rectangle net NetB7_1: 575,275 645,350
  rectangle net NetB7_1: 435,335 595,435
  rectangle net GND_S: 700,290 735,395
  rectangle net NetB10_2: 517.76,1367.52 697.76,1442.52
  rectangle net NetQ1_1: 502.76,1547.52 637.76,1627.52
  rectangle net GND_S: 587.76,16.04 652.76,57.52
  rectangle net GND_S: 137.76,16.87 207.76,62.52
  rectangle net GND: 455,100 540,135
  rectangle net GND_S: -20,1220 -5,1260
  region net +5V: 9.44,972.74 181.75,972.68 203.37,951.07 349.92,951.07 363.58,964.73 391.25,964.73 398.91,957.07 398.91,908.57 392.2,901.86 319.38,901.86 297.68,880.15 9.44,880.15
  region net 15VDC: 605,1246.85 190,1246.85 190,1330.71 605,1330.71
  region net GND_S: 735,280 715,260 715,285 720,290 735,290

## Silkscreen, mask and mechanical layers (free items; w line width, h text height)
Silkscreen Bottom:
  lines w5: 427.76,82.52 427.76,92.52 ; 437.76,92.52 427.76,92.52 ; 527.76,77.52 442.76,77.52 427.76,92.52
  text "DRY+" at 372.76,2157.52 h35 r90
  text "DRY-" at 417.76,2157.52 h35 r90
  text "Earth" at 462.76,2157.52 h35 r90
  text "Earth" at 275,85 h25 r90
  text "EN" at 310,80 h25 r90
  text "GND" at 482.76,72.52 h25 r90
  text "VCC" at 532.76,72.52 h25 r90
  text "NC" at 445,70 h25 r90
  text "STA" at 390,65 h25 r90
Assembly Drawing Top:
  the board outline again, w0.5
Layer_14:
  drawing of 219 lines, arcs and shapes, not listed